# Altium PCB fmc-320u-a1.PcbDoc (part 1 of 2)
Units mm, origin at the board's own origin, x right, y up, seen from the top; angles counter-clockwise.
Board outline 96 x 84 mm, 2 copper layers (L1, L2), stack 0.533 mm thick; 72 components, 120 nets, 399 pads, 155 vias.
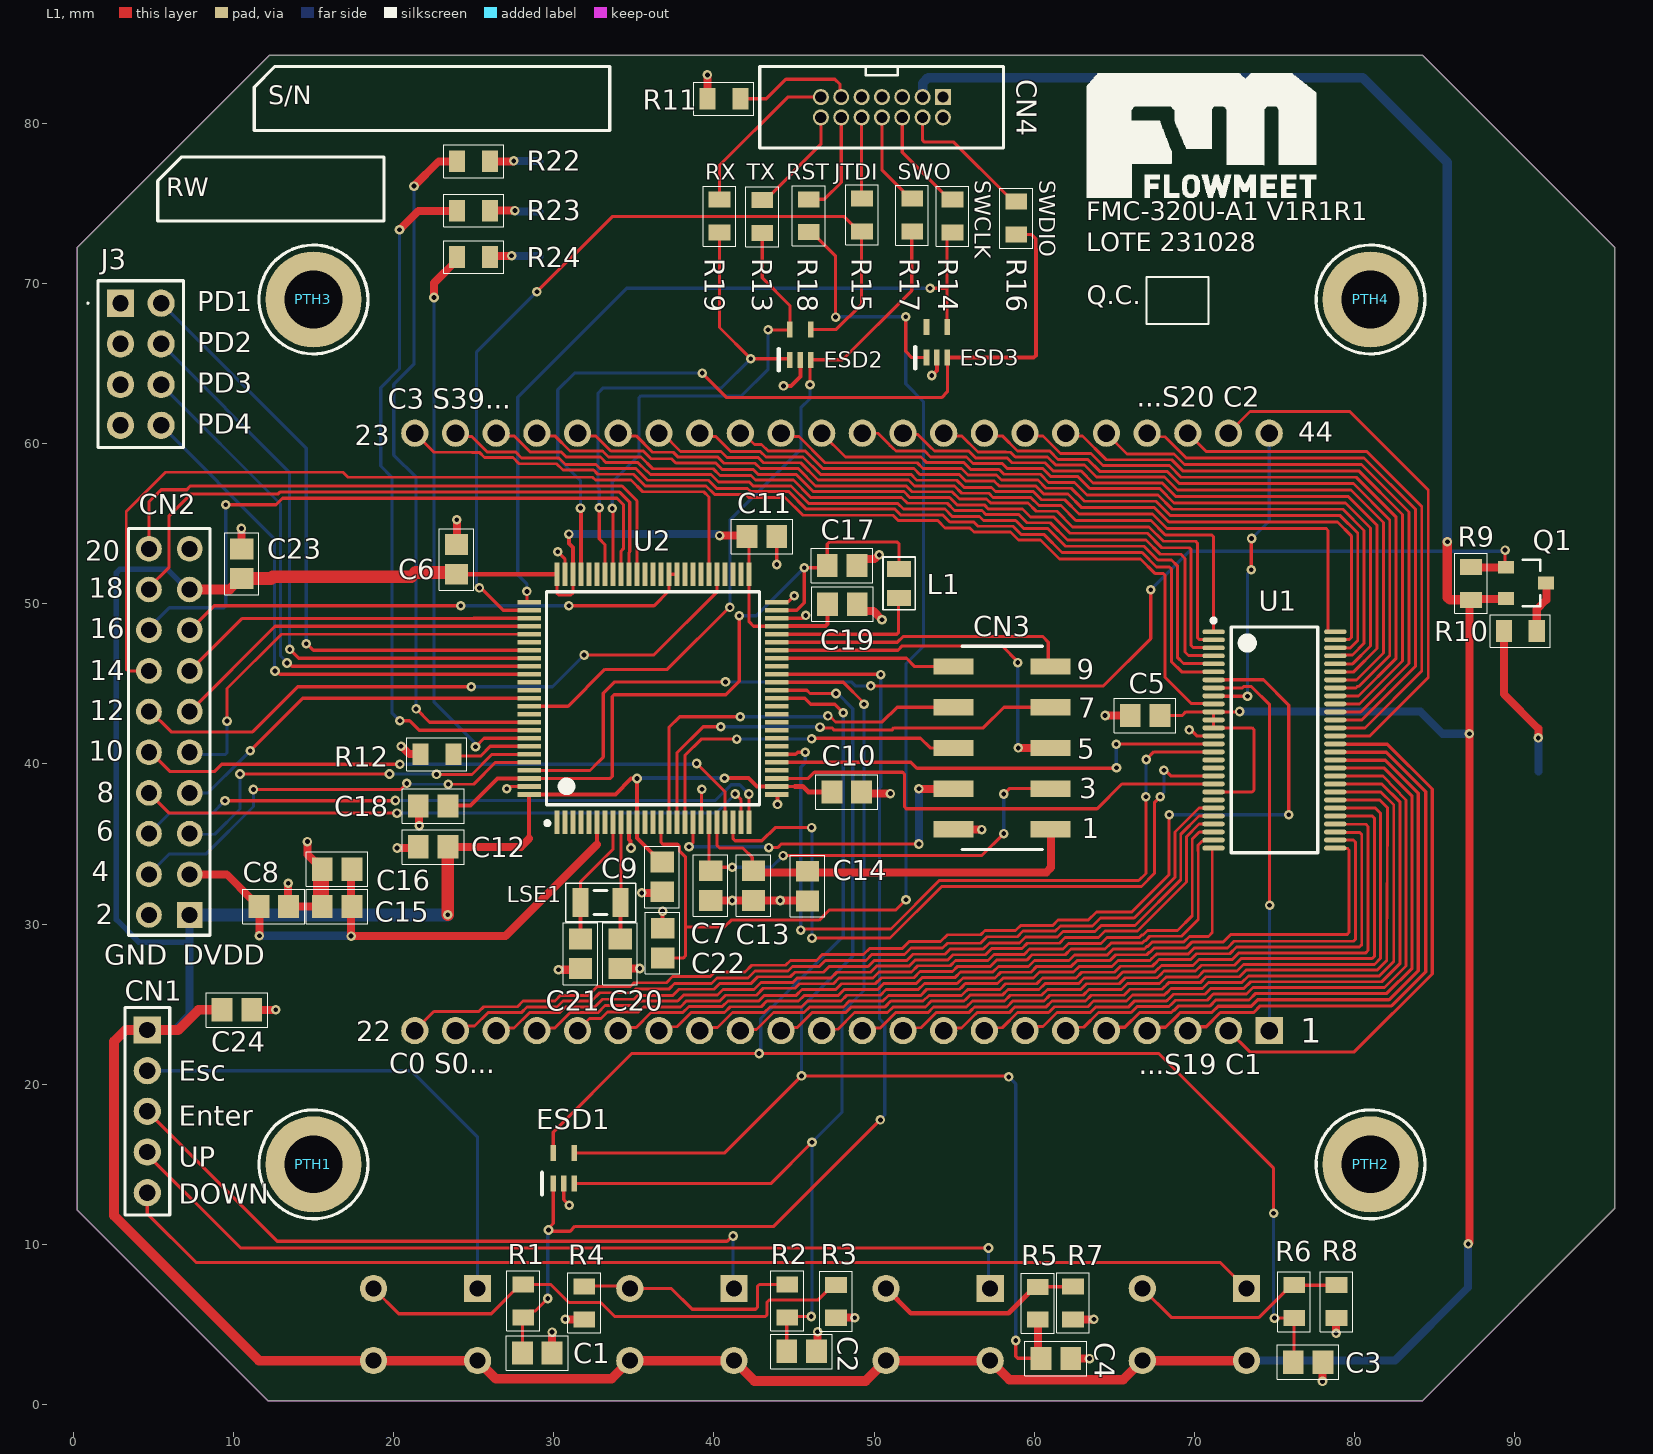
[diagram p0: L1 view]
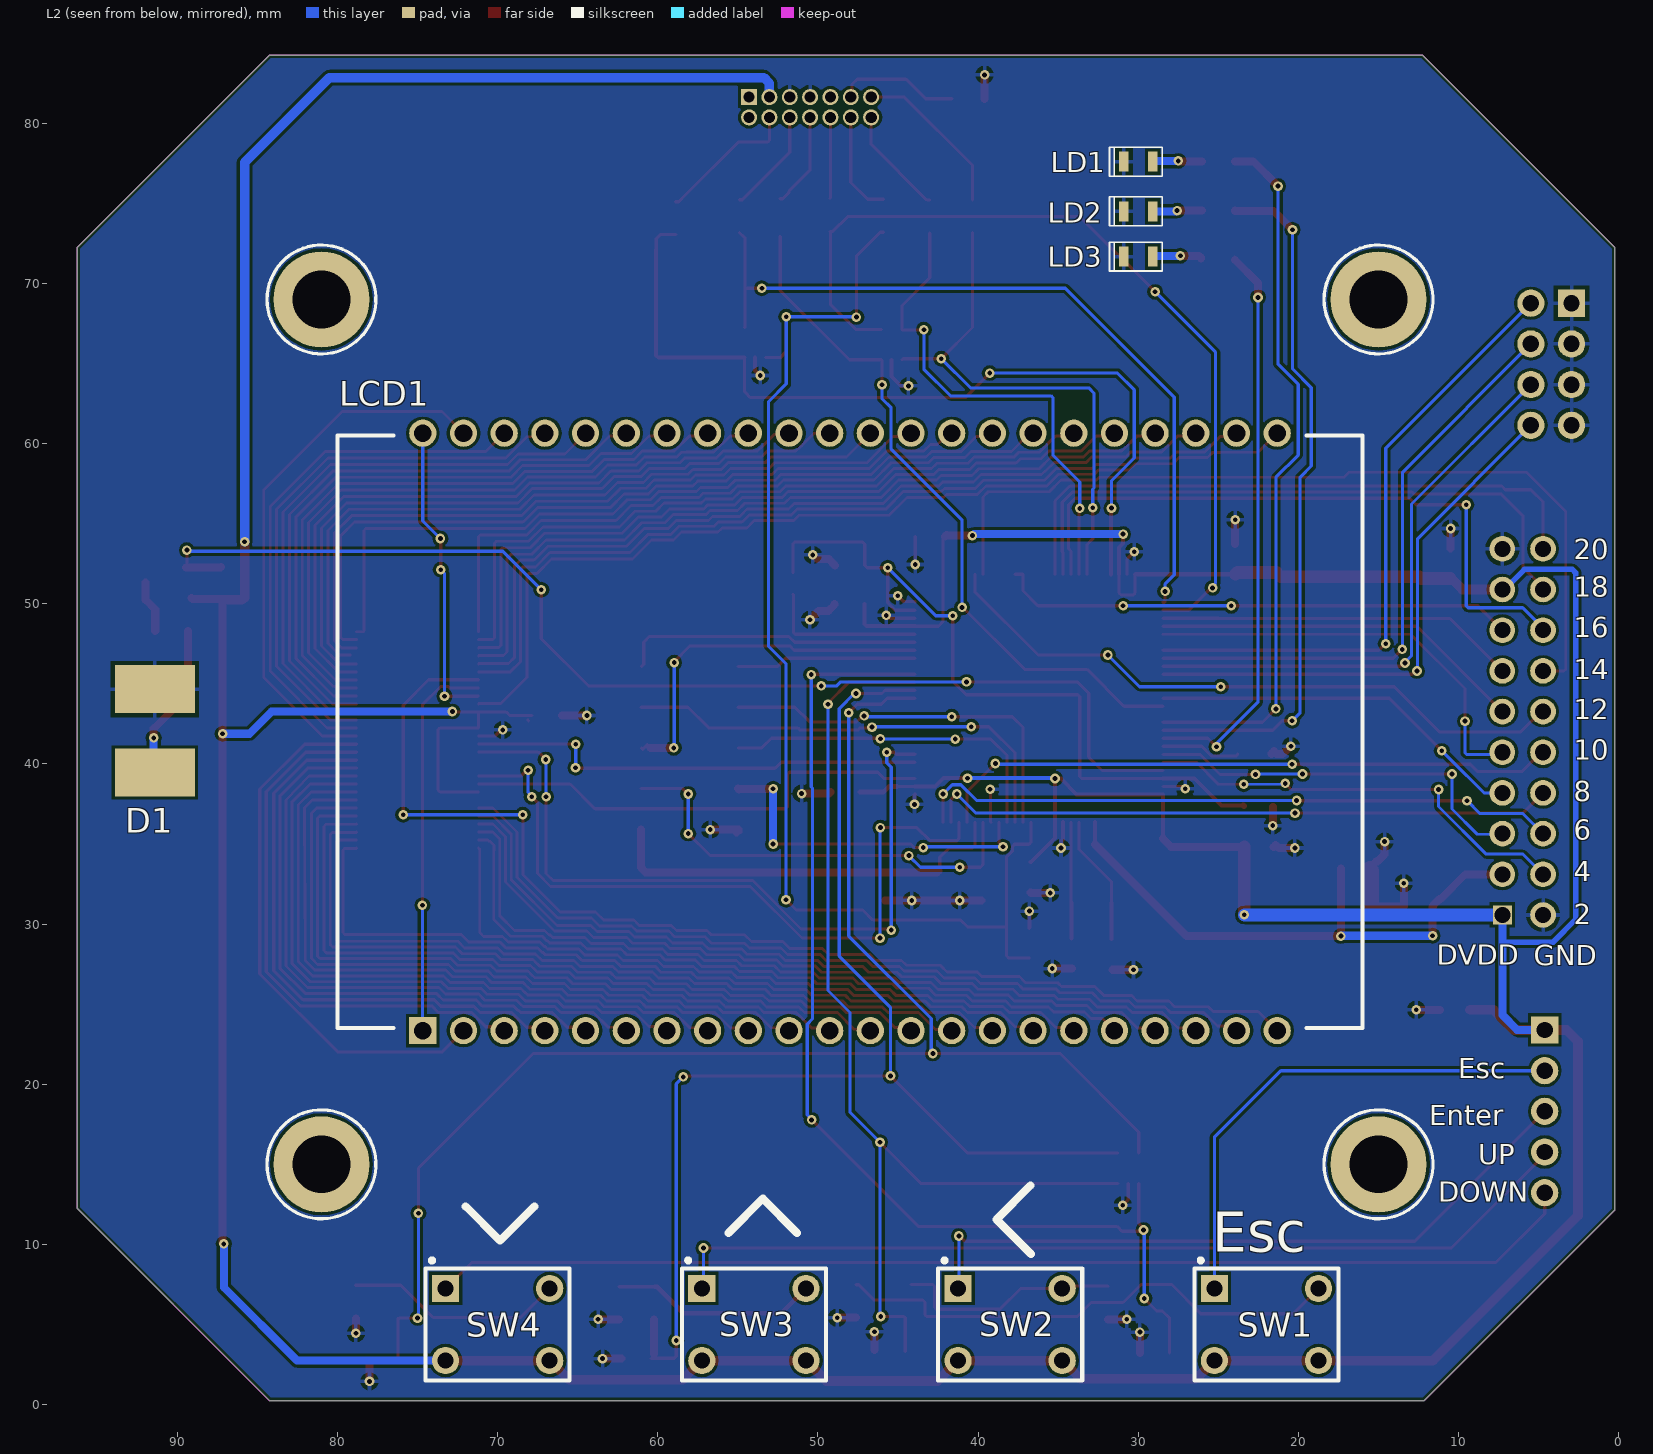
[diagram p1: L2 view, seen from below]
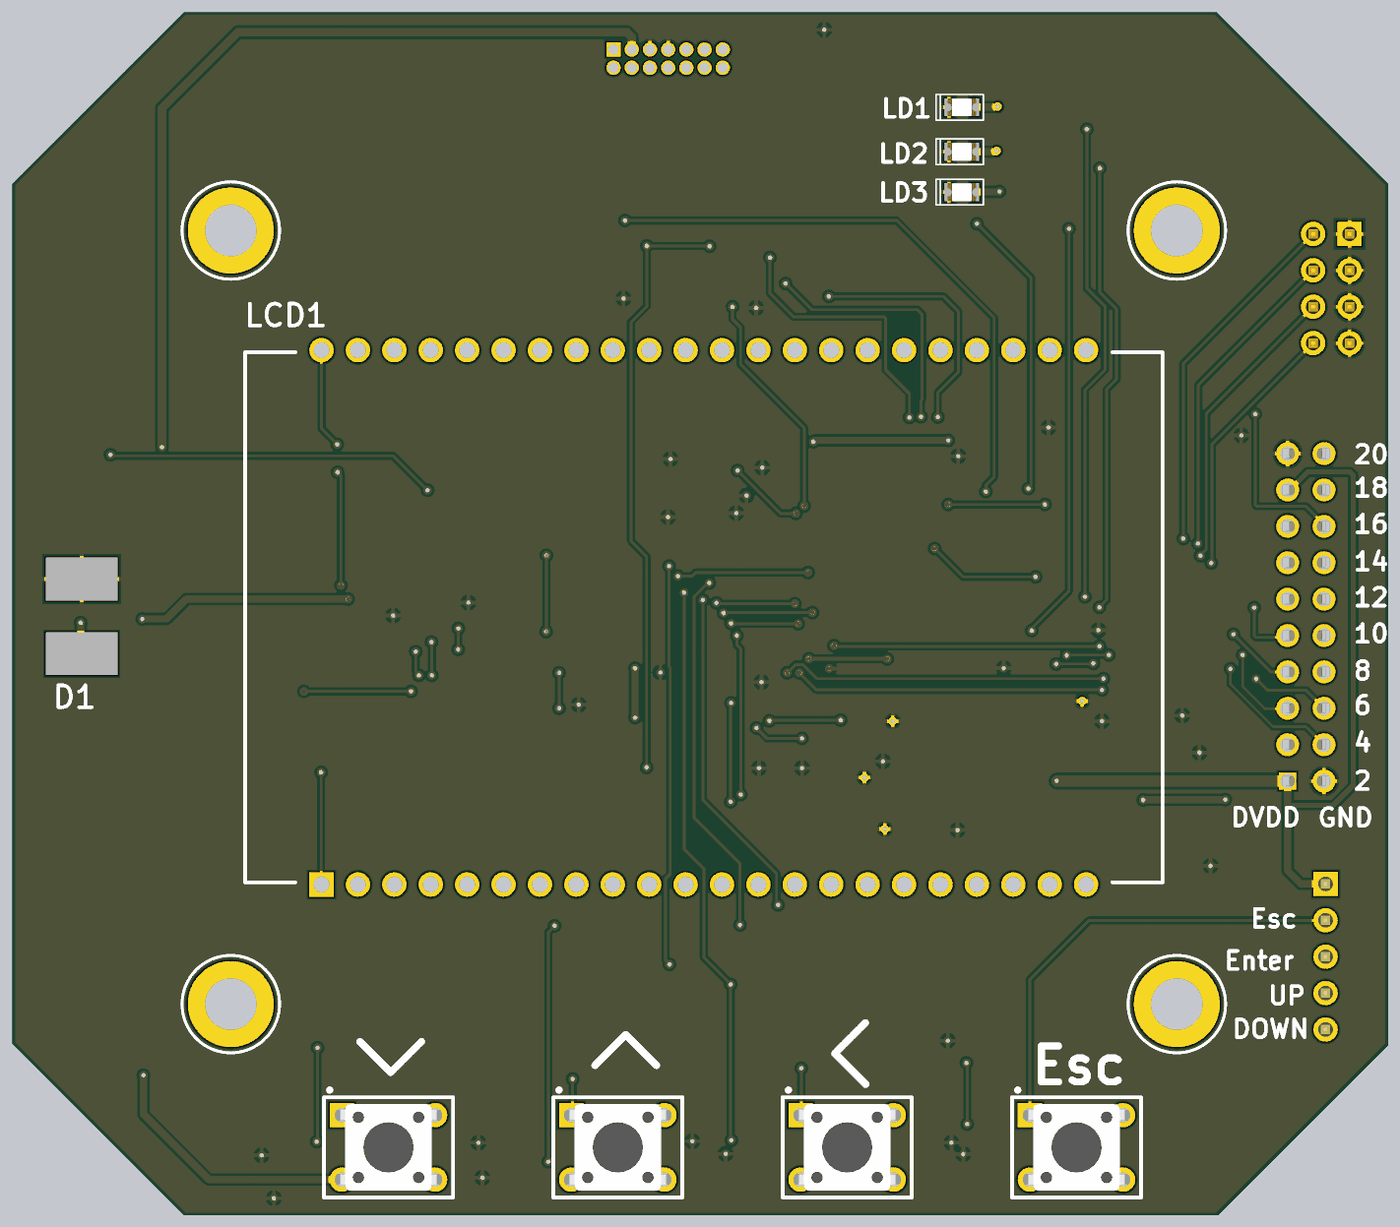
[diagram p3: 3D render of the assembled board from below, using the file's embedded part models]

## Layer stack, top to bottom
Top Solder: solder mask 0.0102, Solder Resist, Dk 3.5
L1: signal copper 0.0356
Dielectric 2: prepreg 0.0711, PP-006, Dk 4.1
Dielectric 1: dielectric 0.32, FR-4, Dk 4.8
Dielectric 3: prepreg 0.0711, PP-006, Dk 4.1
L2: signal copper 0.0356
Bottom Solder: solder mask 0.0102, Solder Resist, Dk 3.5

## Board outline
0.25,12.15 0.25,72.25 12.25,84.25 84.25,84.25 96.25,72.25 96.25,12.25 84.25,0.25 12.15,0.25

## Design rules (kind name [scope] priority, off if disabled: settings)
BoardOutlineClearance [All] p1: gap=0.2 ignorepadtopadclearanceinfootprint=FALSE
Clearance [All] p1: gap=0.18 ignorepadtopadclearanceinfootprint=FALSE
ComponentClearance [All] p1: gap=0.099 collisioncheckmode=3 verticalgap=0.099 showdistances=FALSE
HoleSize [All] p1: absolutevalues=TRUE maxlimit=6 minlimit=0.25 maxpercent=80.000 minpercent=20.000
MinimumSolderMaskSliver [All] p1: minsoldermaskwidth=0.051
PolygonConnect [All] p1: connectstyle=Relief reliefconductorwidth=0.254 reliefentries=4 polygonreliefangle="90 Angle" airgapwidth=0.254
RoutingVias [All] p1: holewidth=0.3 width=0.6 viastyle="Through Hole" minholewidth=0.3 minwidth=0.6 maxholewidth=6 maxwidth=10
SilkToSilkClearance [All] p1: silktosilkclearance=0.15
SilkToSolderMaskClearance [IsPad] p1: minsilkscreentomaskgap=0.15 clearancetoexposedcopper=TRUE
SolderMaskExpansion [All] p1: expansion=0.102 istentingtop=FALSE
Width [All] p1: maxlimit=10 minlimit=0.18 preferedwidth=0.2
25 further rules are at their usual default settings.

## Components (designator, comment, footprint, x,y, rotation, side; value= is the part's Value field where it differs from the comment)
C1 "100nF" CAP_SM0805_YAGEOCC2_N 28.975,3.215 r0 top
C2 "100nF" CAP_SM0805_YAGEOCC2_N 45.475,3.325 r0 top
C3 "100nF" CAP_SM0805_YAGEOCC2_N 77.1,2.65 r0 top
C4 "100nF" CAP_SM0805_YAGEOCC2_N 61.35,2.875 r0 top
C5 "100nF" CAP_SM0805_YAGEOCC2_N 66.923,43.025 r180 top
C6 "100nF" CAP_SM0805_YAGEOCC2_N 23.925,52.773 r90 top
C7 "100nF" CAP_SM0805_YAGEOCC2_N 39.8,32.402 r270 top
C8 "10uF" CAP_SM0805_YAGEOCC2_N 12.523,31.1 r0 top
C9 "100nF" CAP_SM0805_YAGEOCC2_N 36.775,32.95 r270 top
C10 "100nF" CAP_SM0805_YAGEOCC2_N 48.298,38.25 r0 top
C11 "100nF" CAP_SM0805_YAGEOCC2_N 43,54.2 r0 top
C12 "100nF" CAP_SM0805_YAGEOCC2_N 22.475,34.825 r180 top
C13 "100nF" CAP_SM0805_YAGEOCC2_N 42.475,32.402 r270 top
C14 "2.2uF" CAP_SM0805_YAGEOCC2_N 45.85,32.375 r270 top
C15 "100nF" CAP_SM0805_YAGEOCC2_N 16.473,31.1 r180 top
C16 "1uF" CAP_SM0805_YAGEOCC2_N 16.473,33.427 r180 top
C17 "2.2uF" CAP_SM0805_YAGEOCC2_N 48.007,52.396 r0 top
C18 "2.2uF" CAP_SM0805_YAGEOCC2_N 22.475,37.375 r180 top
C19 "10uF" CAP_SM0805_YAGEOCC2_N 48.027,49.975 r0 top
C20 "12pF" CAP_SM0805_YAGEOCC2_N 34.15,28.15 r270 top
C21 "12pF" CAP_SM0805_YAGEOCC2_N 31.675,28.15 r270 top
C22 "100nF" CAP_SM0805_YAGEOCC2_N 36.805,28.816 r90 top
C23 "10uF" CAP_SM0805_YAGEOCC2_N 10.525,52.502 r270 top
C24 "10uF" CAP_SM0805_YAGEOCC2_N 10.223,24.65 r0 top
CN1 "54101-T0605LF" "HEADER PIN 1X5" 4.625,18.31 r270 top locked
CN2 "DW254R-22-20-85" DW254R-22-10-85 6,42 r90 top
CN3 "DW254S-22-10-85" "2X5 100 MILS SMD" 58,41 r90 top locked
CN4 "20021511-00014T4LF" 2002151100014T4LF 50.49,81 r180 top (schematic designator J1)
D1 "BACKLIGHT" BACKLIGHT 50,42 r180 bottom locked
ESD1 "ESDALC6V1W5" ESDALC6V1W5 30.625,14.75 r90 top locked
ESD2 "ESDALC6V1W5" ESDALC6V1W5 45.4,66.182 r90 top
ESD3 "ESDALC6V1W5" ESDALC6V1W5 53.924,66.319 r90 top
J3 "B-2100S08P-B110-JUMPER" "HEADER PIN 2X4" 4.22,64.955 r270 top
L1 "2.2uH" LQM21PN2R2MGHL 51.562,51.268 r270 top
LCD1 "FM-160LCD-V2R2R1" "FMC-160LCD V2" 48,42 r180 bottom locked
LD1 "RED" "LED 0805" 30,77.6 r0 bottom
LD2 "GREEN" "LED 0805" 30,74.5 r0 bottom
LD3 "BLUE" "LED 0805" 30,71.675 r0 bottom
LSE1 "32.768 Hz" SC-32S32.768kHz20PPM12.5pF 32.925,31.35 r180 top
PTH1 "PTH-3MM-M" PTH_M3_M 15,15 r0 top
PTH2 "PTH-3MM-M" PTH_M3_M 81,15 r0 top
PTH3 "PTH-3MM-M" PTH_M3_M 15,69 r0 top
PTH4 "PTH-3MM-M" PTH_M3_M 81,69 r0 top
Q1 "DMG3401LSN-7" DMG3401LSN-7 90.85,51.3 r0 top
R1 "100K" RES_SM0805_YAGEORC_N 28.097,6.474 r270 top
R2 "100K" RES_SM0805_YAGEORC_N 44.575,6.477 r270 top
R3 "100K" RES_SM0805_YAGEORC_N 47.625,6.45 r90 top
R4 "100K" RES_SM0805_YAGEORC_N 31.9,6.35 r90 top
R5 "100K" RES_SM0805_YAGEORC_N 60.225,6.327 r270 top
R6 "100K" RES_SM0805_YAGEORC_N 76.225,6.427 r270 top
R7 "100K" RES_SM0805_YAGEORC_N 62.425,6.352 r90 top
R8 "100K" RES_SM0805_YAGEORC_N 78.875,6.427 r90 top
R9 "1M" RES_SM0805_YAGEORC_N 87.275,51.277 r270 top
R10 "47R" RES_SM0805_YAGEORC_N 90.35,48.3 r0 top
R11 "100R" RES_SM0805_YAGEORC_N 40.625,81.525 r0 top
R12 "10K" RES_SM0805_YAGEORC_N 22.708,40.615 r0 top
R13 "47R" RES_SM0805_YAGEORC_N 43.025,74.175 r270 top
R14 "47R" RES_SM0805_YAGEORC_N 54.9,74.2 r270 top
R15 "47R" RES_SM0805_YAGEORC_N 49.25,74.275 r270 top
R16 "47R" RES_SM0805_YAGEORC_N 58.875,74.075 r270 top
R17 "47R" RES_SM0805_YAGEORC_N 52.375,74.263 r270 top
R18 "47R" RES_SM0805_YAGEORC_N 45.925,74.225 r270 top
R19 "47R" RES_SM0805_YAGEORC_N 40.35,74.2 r270 top
R22 "1K" RES_SM0805_YAGEORC_N 25,77.625 r0 top
R23 "1K" RES_SM0805_YAGEORC_N 25,74.549 r0 top
R24 "1K" RES_SM0805_YAGEORC_N 25,71.653 r0 top
SW1 "TC-1102-B-A-B" TC-1102-B-A-B 22,5 r180 bottom locked
SW2 "TC-1102-B-A-B" TC-1102-B-A-B 38,5 r180 bottom locked
SW3 "TC-1102-B-A-B" TC-1102-B-A-B 54,5 r180 bottom locked
SW4 "TC-1102-B-A-B" TC-1102-B-A-B 70,5 r180 bottom locked
U1 "PCF8553DTT" "LCD DRIVER - TSSOP56" 75,41.5 r0 top locked
U2 "STM32U575VI_1" STM32U575VI 36.2,44.1 r90 top locked

## Footprints (in the part's own frame and the unit in brackets; to place one, negate y for a bottom-side part, rotate by r counter-clockwise, add the part's x,y. Pads: shape width x height; smd on the part's side, far side on the other; paste and mask are expansions set on the pad)
"2X5 100 MILS SMD" [mm]
  rect 1.02x2.5 smd: 1(-5.08,-3.025) 2(-5.08,3.025) 3(-2.54,-3.025) 4(-2.54,3.025) 5(0,-3.025) 6(0,3.025) 7(2.54,-3.025) 8(2.54,3.025) 9(5.08,-3.025) 10(5.08,3.025)
  silkscreen extent -6.35,-2.51 6.35,2.51, body extent -6.39,-3.02 6.23,3.02, height 7.2
2002151100014T4LF [mm]
  rect 1x1 hole 0.7: 1(-3.81,-0.635)
  round 1 hole 0.7: 2(-3.81,0.635) 3(-2.54,-0.635) 4(-2.54,0.635) 5(-1.27,-0.635) 6(-1.27,0.635) 7(0,-0.635) 8(0,0.635) 9(1.27,-0.635) 10(1.27,0.635) 11(2.54,-0.635) 12(2.54,0.635) 13(3.81,-0.635) 14(3.81,0.635)
  silkscreen extent -7.59,-2.54 7.62,2.55, body extent -7.57,-2.55 7.62,2.55, height 5.4
BACKLIGHT [mm]
  rect 5x3 smd: 1(-41.402,-2.54) 2(-41.402,2.667)
  body extent -39.37,-16.5 34.5,16.5, height 3
CAP_SM0805_YAGEOCC2_N [mm] "Capacitor, Yageo CC Class2, SM0805, IPC Medium Density"
  rect 1.3x1.45 smd: 1(-0.927,0) 2(0.927,0)
  silkscreen extent -1.92,-1.07 1.92,1.07, body extent -1.1,-0.72 1.1,0.72, height 1.45
DMG3401LSN-7 [mm]
  rect 1x0.8 smd: D(1.1,0) G(-1.4,0.975) S(-1.4,-0.975)
  silkscreen extent -0.35,-1.45 0.75,1.45, body extent -1.67,-1.55 1.33,1.55, height 1.45
DW254R-22-10-85 [mm]
  rect 1.6x1.6 / inner round 1.2 / far side rect 1.2x1.2 hole 1: 1(-11.43,-1.27)
  round 1.6 hole 1: 2(-11.43,1.27) 3(-8.89,-1.27) 4(-8.89,1.27) 5(-6.35,-1.27) 6(-6.35,1.27) 7(-3.81,-1.27) 8(-3.81,1.27) 9(-1.27,-1.27) 10(-1.27,1.27) 11(1.27,-1.27) 12(1.27,1.27) 13(3.81,-1.27) 14(3.81,1.27) 15(6.35,-1.27) 16(6.35,1.27) 17(8.89,-1.27) 18(8.89,1.27) 19(11.43,-1.27) 20(11.43,1.27)
  silkscreen extent -12.7,-2.54 12.7,2.54, body extent -12.7,-2.54 12.7,2.54, height 8.55
ESDALC6V1W5 [mm]
  rect 1x0.35 smd: 1(-0.95,0.65) 2(-0.95,0) 3(-0.95,-0.65) 4(0.95,-0.65) 5(0.95,0.65)
  silkscreen extent -1.63,1.35 -0.28,1.35, body extent -1.07,-1 1.03,1, height 1.1
"FMC-160LCD V2" [mm]
  rect 1.7x1.7 hole 1.1: 1(-26.67,-18.65)
  round 1.7 hole 1.1: 2(-24.13,-18.65) 3(-21.59,-18.65) 4(-19.05,-18.65) 5(-16.51,-18.65) 6(-13.97,-18.65) 7(-11.43,-18.65) 8(-8.89,-18.65) 9(-6.35,-18.65) 10(-3.81,-18.65) 11(-1.27,-18.65) 12(1.27,-18.65) 13(3.81,-18.65) 14(6.35,-18.65) 15(8.89,-18.65) 16(11.43,-18.65) 17(13.97,-18.65) 18(16.51,-18.65) 19(19.05,-18.65) 20(21.59,-18.65) 21(24.13,-18.65) 22(26.67,-18.65) 23(26.67,18.65) 24(24.13,18.65) 25(21.59,18.65) 26(19.05,18.65) 27(16.51,18.65) 28(13.97,18.65) 29(11.43,18.65) 30(8.89,18.65) 31(6.35,18.65) 32(3.81,18.65) 33(1.27,18.65) 34(-1.27,18.65) 35(-3.81,18.65) 36(-6.35,18.65) 37(-8.89,18.65) 38(-11.43,18.65) 39(-13.97,18.65) 40(-16.51,18.65) 41(-19.05,18.65) 42(-21.59,18.65) 43(-24.13,18.65) 44(-26.67,18.65)
  silkscreen extent -32,-18.5 32,18.5, body extent -32,-19.56 32,19.54, height 7
"HEADER PIN 1X5" [mm]
  rect 1.7x1.7 hole 1.02: 1(-5.08,0)
  round 1.7 hole 1.02: 2(-2.54,0) 3(0,0) 4(2.54,0) 5(5.08,0)
  silkscreen extent -6.48,-1.4 6.48,1.4, body extent -6.35,-1.27 6.35,1.27, height 8.47
"HEADER PIN 2X4" [mm]
  rect 1.7x1.7 hole 1.02: 1(-3.81,-1.27)
  round 1.7 hole 1.02: 2(-3.81,1.27) 3(-1.27,-1.27) 4(-1.27,1.27) 5(1.27,-1.27) 6(1.27,1.27) 7(3.81,-1.27) 8(3.81,1.27)
  silkscreen extent -5.21,-3.35 5.21,2.67, body extent -5.08,-2.54 5.08,2.54, height 8.89
"LCD DRIVER - TSSOP56" [mm] "TSSOP, 56-Leads, Body 14,00x6,10mm, Pitch 0,50mm, IPC Medium Density"
  oval 1.4x0.3 smd: 1(-3.8,6.75) 2(-3.8,6.25) 3(-3.8,5.75) 4(-3.8,5.25) 5(-3.8,4.75) 6(-3.8,4.25) 7(-3.8,3.75) 8(-3.8,3.25) 9(-3.8,2.75) 10(-3.8,2.25) 11(-3.8,1.75) 12(-3.8,1.25) 13(-3.8,0.75) 14(-3.8,0.25) 15(-3.8,-0.25) 16(-3.8,-0.75) 17(-3.8,-1.25) 18(-3.8,-1.75) 19(-3.8,-2.25) 20(-3.8,-2.75) 21(-3.8,-3.25) 22(-3.8,-3.75) 23(-3.8,-4.25) 24(-3.8,-4.75) 25(-3.8,-5.25) 26(-3.8,-5.75) 27(-3.8,-6.25) 28(-3.8,-6.75) 29(3.8,-6.75) 30(3.8,-6.25) 31(3.8,-5.75) 32(3.8,-5.25) 33(3.8,-4.75) 34(3.8,-4.25) 35(3.8,-3.75) 36(3.8,-3.25) 37(3.8,-2.75) 38(3.8,-2.25) 39(3.8,-1.75) 40(3.8,-1.25) 41(3.8,-0.75) 42(3.8,-0.25) 43(3.8,0.25) 44(3.8,0.75) 45(3.8,1.25) 46(3.8,1.75) 47(3.8,2.25) 48(3.8,2.75) 49(3.8,3.25) 50(3.8,3.75) 51(3.8,4.25) 52(3.8,4.75) 53(3.8,5.25) 54(3.8,5.75) 55(3.8,6.25) 56(3.8,6.75)
  silkscreen extent -3.92,-7.05 2.7,7.57, body extent -4.05,-7.05 4.05,7.05, height 1.2
"LED 0805" [mm]
  rect 0.6x1.25 smd: A(-0.9,0) K(0.9,0)
  silkscreen extent -1.5,-0.9 1.8,0.9, body extent -1,-0.63 1,0.63, height 1
LQM21PN2R2MGHL [mm]
  rect 1x1.5 smd: 1(-0.9,0) 2(0.9,0)
  silkscreen extent -1.65,-1 1.65,1, body extent -1,-0.62 1,0.62, height 1.02
PTH_M3_M [mm]
  round 6 hole 3.6: 1(0,0)
  silkscreen extent -3.4,-3.4 3.4,3.4
RES_SM0805_YAGEORC_N [mm] "Resistor, Yageo RC_L, SM0805, IPC Medium Density"
  rect 1x1.35 smd: 1(-1.027,0) 2(1.027,0)
  silkscreen extent -1.88,-1.02 1.88,1.02, body extent -1.05,-0.67 1.05,0.67, height 0.6
SC-32S32.768kHz20PPM12.5pF [mm]
  rect 1x1.8 smd: 1(-1.25,0) 2(1.25,0)
  silkscreen extent -2.21,-1.19 2.18,1.19, body extent -1.65,-0.84 1.65,0.76, height 0.84
STM32U575VI [mm] "Ultra-low-power with FPU Arm Cortex-M33 MCU with TrustZone, 160 MHz with 2 Mbytes of Flash memory"
  rect 1.475x0.3 smd mask+0.051: 1(-7.738,6) 2(-7.738,5.5) 3(-7.738,5) 4(-7.738,4.5) 5(-7.738,4) 6(-7.738,3.5) 7(-7.738,3) 8(-7.738,2.5) 9(-7.738,2) 10(-7.738,1.5) 11(-7.738,1) 12(-7.738,0.5) 13(-7.738,0) 14(-7.738,-0.5) 15(-7.738,-1) 16(-7.738,-1.5) 17(-7.738,-2) 18(-7.738,-2.5) 19(-7.738,-3) 20(-7.738,-3.5) 21(-7.738,-4) 22(-7.738,-4.5) 23(-7.738,-5) 24(-7.738,-5.5) 25(-7.738,-6) 51(7.738,-6) 52(7.738,-5.5) 53(7.738,-5) 54(7.738,-4.5) 55(7.738,-4) 56(7.738,-3.5) 57(7.738,-3) 58(7.738,-2.5) 59(7.738,-2) 60(7.738,-1.5) 61(7.738,-1) 62(7.738,-0.5) 63(7.738,0) 64(7.738,0.5) 65(7.738,1) 66(7.738,1.5) 67(7.738,2) 68(7.738,2.5) 69(7.738,3) 70(7.738,3.5) 71(7.738,4) 72(7.738,4.5) 73(7.738,5) 74(7.738,5.5) 75(7.738,6)
  rect 0.3x1.475 smd mask+0.051: 26(-6,-7.738) 27(-5.5,-7.738) 28(-5,-7.738) 29(-4.5,-7.738) 30(-4,-7.738) 31(-3.5,-7.738) 32(-3,-7.738) 33(-2.5,-7.738) 34(-2,-7.738) 35(-1.5,-7.738) 36(-1,-7.738) 37(-0.5,-7.738) 38(0,-7.738) 39(0.5,-7.738) 40(1,-7.738) 41(1.5,-7.738) 42(2,-7.738) 43(2.5,-7.738) 44(3,-7.738) 45(3.5,-7.738) 46(4,-7.738) 47(4.5,-7.738) 48(5,-7.738) 49(5.5,-7.738) 50(6,-7.738) 76(6,7.738) 77(5.5,7.738) 78(5,7.738) 79(4.5,7.738) 80(4,7.738) 81(3.5,7.738) 82(3,7.738) 83(2.5,7.738) 84(2,7.738) 85(1.5,7.738) 86(1,7.738) 87(0.5,7.738) 88(0,7.738) 89(-0.5,7.738) 90(-1,7.738) 91(-1.5,7.738) 92(-2,7.738) 93(-2.5,7.738) 94(-3,7.738) 95(-3.5,7.738) 96(-4,7.738) 97(-4.5,7.738) 98(-5,7.738) 99(-5.5,7.738) 100(-6,7.738)
  silkscreen extent -7.9,-6.65 6.65,6.7, body extent -8.1,-8.1 8.1,8.1, height 1.6
TC-1102-B-A-B [mm] "Tactile 6x6mm true hole"
  rect 1.7x1.7 hole 1: 1(-3.25,2.25)
  round 1.7 hole 1: 2(3.25,2.25) 3(-3.25,-2.25) 4(3.25,-2.25)
  silkscreen extent -4.5,-3.5 4.5,4.12, body extent -3.87,-3.02 3.87,3.01, height 5.02

## Part data
C1 C2 C3 C4 C5: library part CC0805KRX7R8BB104, "CAP 100nF SM0805 X7R 25V YAGEO CC2", Manufacturer=Yageo, Package=0805, Supplier Part Number 1=644249, Tolerance (%)=10, Voltage Rating (Volts)=25, Category=Capacitor, ComponentLink1Description="Manufacturer Website", ComponentLink1URL=http://www.yageo.com, Manufacturer Part Number=CC0805KRX7R8BB104, Supplier 1=Farnell, Supplier 2=Digi-Key, Supplier Part Number 2=311-1141-1-ND
C6 C7 C9 C10 C11 C12 C13 C15 C22: library part CC0805KRX7R9BB104, "CAP 100nF SM0805 X7R 50V YAGEO CC2", Manufacturer=Yageo, Package=0805, Supplier Part Number 1=3019949, Tolerance (%)=10, Voltage Rating (Volts)=50, Category=Capacitor, ComponentLink1Description="Manufacturer Website", ComponentLink1URL=http://www.yageo.com, Manufacturer Part Number=CC0805KRX7R9BB104, Supplier 1=Farnell, Supplier 2=Digi-Key, Supplier Part Number 2=311-1140-1-ND
C8 C19 C23 C24: library part CC0805KKX5R8BB106, "CAP 10uF SM0805 X5R 25V YAGEO", Manufacturer=Yageo, Package=0805, Tolerance=10, Category=Capacitor, ComponentLink1Description="Manufacturer Website", ComponentLink1URL=http://www.yageo.com, Manufacturer Part Number=CC0805KKX5R8BB106
C14 C17 C18: library part CC0805KKX7R8BB225, "CAP 2u2F SM0805 X7R 25V YAGEO CC2", Manufacturer=Yageo, Package=0805, Supplier Part Number 1=1458904, Tolerance (%)=10, Voltage Rating (Volts)=25, Category=Capacitor, ComponentLink1Description="Manufacturer Website", ComponentLink1URL=http://www.yageo.com, Manufacturer Part Number=CC0805KKX7R8BB225, Supplier 1=Farnell, Supplier 2=Digi-Key
C16: library part CC0805KKX7R8BB105, "CAP 1uF SM0805 X7R 25V YAGEO CC2", Manufacturer=Yageo, Package=0805, Supplier Part Number 1=1458903, Tolerance (%)=10, Voltage Rating (Volts)=25, Category=Capacitor, ComponentLink1Description="Manufacturer Website", ComponentLink1URL=http://www.yageo.com, Manufacturer Part Number=CC0805KKX7R8BB105, Supplier 1=Farnell, Supplier 2=Digi-Key, Supplier Part Number 2=311-1456-1-ND
C20 C21: library part CC0805JRNPO9BN120, "CAP 12pF SM0805 NPO 50V YAGEO CC2", Manufacturer=Yageo, Package=0805, Tolerance (%)=5, Voltage Rating (Volts)=50, Category=Capacitor, ComponentLink1Description="Manufacturer Website", ComponentLink1URL=http://www.yageo.com, Manufacturer Part Number=CC0805JRNPO9BN120
CN1: "1 x 5 - true hole  2.54mm - Pb free", Manufacturer="Amphenol ICC", Category="Header pin", Datasheet=https://datasheet.lcsc.com/lcsc/2202082130_Amphenol-ICC-54101-T06-00_C213463.pdf, Manufacturer Part Number=54101-T0605LF
CN2: "2 x 10 - true hole 2.54mm - altura 8.5mm", Manufacturer=Dealon, Category="Header female", Part Nunber=DW254R-22-20-85
CN3: "2 x 5 - SMD 2.54mm - altura 8.5mm", Manufacturer=Dealon, Category="Header female", Datasheet=https://datasheet.lcsc.com/lcsc/2209141730_DEALON-DW254S-22-10-85_C5160820.pdf, Manufacturer Part Number=DW254S-22-10-85
CN4: "1.27mm (0.05in.) pitch, Shrouded header, 14 contacts", Manufacturer="Amphenol ICC", Category="Header Shrouded", Datasheet=https://cdn.amphenol-cs.com/media/wysiwyg/files/drawing/20021511.pdf, Manufacturer Part Number=20021511-00014T4LF
D1: library part FM-160-BACKLIGHT, "IF=45mA;VF=3V", Manufacturer="Provided by us", Category=Backlight, ComponentLink1Description=Datasheet, Manufacturer Part Number="Provided by us"
ESD1 ESD2 ESD3: "TVS Diode Array Uni-Directional 6.1V  / QTY 5 per pack, SOT-323 /  / Ranking 5:  / Marca reconocida. / Usado en placas nucleo, sometidas a manipuleo nunca note un pin quemado por ESD.", Manufacturer=ST, Category=Diodo, ComponentLink1Description=Datasheet, Datasheet=https://www.st.com/content/ccc/resource/technical/document/datasheet/32/30/02/e6/ac/0f/46/c2/CD00002946.pdf/files/CD00002946.pdf/jcr:content/translations/en.CD00002946.pdf, Manufacturer Part Number=ESDALC6V1W5
J3: "2 x 4 - true hole  2.54mm", Manufacturer=Ckmtw, Manufacturer Part Number=B-2100S08P-B110, Category="Header pin", Datasheet=https://datasheet.lcsc.com/lcsc/2304140030_Ckmtw-Shenzhen-Cankemeng-B-2100S08P-B110_C124386.pdf
L1: library part LQM21PN2R2MGHL, "Inductores de potencia - SMD 2.2 UH 20%", Manufacturer="Murata Electronics", Category=Inductor, Datasheet=https://ar.mouser.com/datasheet/2/281/1/JELF243B_0040-961444.pdf, Manufacturer Part Number=LQM21PN2R2MGHL
LD1: library part 17-21SYGC/S530-E2/TR8, Manufacturer="Everlight Elec", Category=LED, ComponentLink1Description=Datasheet, ComponentLink1URL=https://datasheet.lcsc.com/lcsc/1808272351_Everlight-Elec-17-21SURC-S530-A2-TR8_C131244.pdf, Manufacturer Part Number=17-21SYGC/S530-E2/TR8
LD2: library part 17-21SURC/S530-A2/TR8, Manufacturer="Everlight Elec", Manufacturer Part Number=17-21SYGC/S530-E2/TR8, Category=LED, ComponentLink1Description=Datasheet, Datasheet=https://datasheet.lcsc.com/lcsc/1811011222_Everlight-Elec-17-21SYGC-S530-E2-TR8_C73548.pdf
LD3: library part 17-21/BHC-XL2M2TY/3T, Manufacturer="Everlight Elec", Category=LED, Datasheet=https://datasheet.lcsc.com/lcsc/1809192317_Everlight-Elec-17-21-BHC-XL2M2TY-3T_C72035.pdf, Manufacturer Part Number=17-21/BHC-XL2M2TY/3T
LSE1: library part SC-32S32.768kHz20PPM12.5pF
PTH1 PTH2 PTH3 PTH4: "Agujero de montaje metalizado roscas M3. Drill de tamaño medio."
Q1: "P-CHANNEL ENHANCEMENT MODE MOSFET / RDS(ON) = 85mΩ @ VGS = -2.5V -> ID -2.7A / V(BR)DDS 30V", Manufacturer="Diodes Incorporated", Category="Transistor mosfet", ComponentLink1Description=datasheet, ComponentLink1URL=https://www.digikey.com/es/products/detail/diodes-incorporated/DMG3401LSN-7/3720138?s=N4IgTCBcDaICIFkDiBmALABgIwBkDKAcgLQDsIAugL5A, Manufacurer Part Number=DMG3401LSN-7
R1 R2 R3 R4 R5 R6 R7 R8: library part RC0805FR-07100KL, "RES 100K SM0805 YAGEO RC_L", Manufacturer=Yageo, Package=0805, Power (Watts)=0.125, Resistance (Ohms)=100000, Supplier Part Number 1=9237879, Tolerance (%)=1, Category=Resistor, ComponentLink1Description="Manufacturer Website", ComponentLink1URL=http://www.yageo.com, Manufacturer Part Number=RC0805FR-07100KL, Supplier 1=Farnell, Supplier 2=Digi-Key, Supplier Part Number 2=311-100KCRCT-ND
R9: library part RC0805FR-071ML, "RES 1M SM0805 YAGEO RC_L", Manufacturer=Yageo, Package=0805, Power (Watts)=0.125, Resistance (Ohms)=1000000, Supplier Part Number 1=9237992, Tolerance (%)=1, Category=Resistor, ComponentLink1Description="Manufacturer Website", ComponentLink1URL=http://www.yageo.com, Manufacturer Part Number=RC0805FR-071ML, Supplier 1=Farnell, Supplier 2=Digi-Key, Supplier Part Number 2=311-1.00MCRCT-ND
R10 R13 R14 R15 R16 R17 R18 R19: library part RC0805FR-0747RL, "RES 47R SM0805 YAGEO RC_L", Manufacturer=Yageo, Package=0805, Power (Watts)=0.125, Resistance (Ohms)=47, Supplier Part Number 1=9237321, Tolerance (%)=1, Category=Resistor, ComponentLink1Description="Manufacturer Website", ComponentLink1URL=http://www.yageo.com, Manufacturer Part Number=RC0805FR-0747RL, Supplier 1=Farnell, Supplier 2=Digi-Key, Supplier Part Number 2=311-47.0CRCT-ND
R11: library part RC0805FR-07100RL, "RES 100R SM0805 YAGEO RC_L", Manufacturer=Yageo, Package=0805, Power (Watts)=0.125, Resistance (Ohms)=100, Supplier Part Number 1=9237364, Tolerance (%)=1, Category=Resistor, ComponentLink1Description="Manufacturer Website", ComponentLink1URL=http://www.yageo.com, Manufacturer Part Number=RC0805FR-07100RL, Supplier 1=Farnell, Supplier 2=Digi-Key, Supplier Part Number 2=311-100CRCT-ND
R12: library part RC0805FR-0710KL, "RES 10K SM0805 YAGEO RC_L", Manufacturer=Yageo, Package=0805, Power (Watts)=0.125, Resistance (Ohms)=10000, Supplier Part Number 1=9237755, Tolerance (%)=1, Category=Resistor, ComponentLink1Description="Manufacturer Website", ComponentLink1URL=http://www.yageo.com, Manufacturer Part Number=RC0805FR-0710KL, Supplier 1=Farnell, Supplier 2=Digi-Key, Supplier Part Number 2=311-10.0KCRCT-ND
R22 R23 R24: library part RC0805FR-071KL, "RES 1K SM0805 YAGEO RC_L", Manufacturer=Yageo, Package=0805, Power (Watts)=0.125, Resistance (Ohms)=1000, Supplier Part Number 1=9237496, Tolerance (%)=1, Category=Resistor, ComponentLink1Description="Manufacturer Website", ComponentLink1URL=http://www.yageo.com, Manufacturer Part Number=RC0805FR-071KL, Supplier 1=Farnell, Supplier 2=Digi-Key, Supplier Part Number 2=311-1.00KCRCT-ND
SW1 SW2 SW3 SW4: "Switch tactile 6x6mm true hole.", Manufacturer="XKB Connectivity", Category="Mechanical Switch", Datasheet=https://datasheet.lcsc.com/lcsc/2110111230_XKB-Connectivity-TC-1102-B-A-B_C480281.pdf, Manufacturer Part Number=TC-1102-B-A-B
U1: "40 × 4 LCD SEGMENT DRIVER", Category="LCD Driver", ComponentLink1Description=datasheet, ComponentLink1URL=https://datasheet.lcsc.com/lcsc/2107141507_NXP-Semicon-PCF8553DTT-AJ_C2653705.pdf
U2: Manufacturer=ST, Manufacturer Part Number=STM32U575VIT6Q, Category=Microcontrolador, Datasheet=https://www.st.com/resource/en/datasheet/stm32u575ag.pdf
LCD1: Category=LCD, ComponentLink1Description=Datasheet

## Via types
v1: diameter 0.6, hole 0.3, L1 to L2, 155 vias

## Nets (pads, with @x,y where several pads share a name; then routed paths per layer and width w, separated by ;. In a path a pad name is that pad's centre, name@x,y a point inside that pad or via, vN(x,y) a via of type N, cw(c..) or ccw(c..) an arc to the next point about the centre after c; other vN are vias at no path point)
ADC_IN3: CN3.6 U2.17 | length 21.7
  L1 w0.2: U2.17@38.2,36.362 38.2,40.55 39.2,41.55 v1@41.325,41.55 ; v1@41.325,41.625 41.4,41.55 v1(41.425,41.55) ; v1(46.1,41.575) 46.125,41.6 52.9,41.6 53.5,41 CN3.6@54.975,41
  L2 w0.2: v1(41.425,41.55) 46.075,41.55 v1(46.1,41.575)
ADC_IN4: CN3.4 U2.18 | length 21.8
  L1 w0.2: v1(38.45,34.825) 38.7,35.075 U2.18@38.7,36.362 ; v1(43.425,34.775) 43.976,34.775 44.201,35 v1(52.8,35)
  L1 w0.5: v1(52.8,38.45) 54.89,38.45 54.94,38.4 CN3.4@55,38.46
  L2 w0.2: v1(38.45,34.825) 43.375,34.825 v1(43.425,34.775)
  L2 w0.5: v1(52.8,35) v1(52.8,38.45)
AVDD: C13.1 C14.1 CN3.1 U2.21 | length 26
  L1 w0.2: U2.21@40.2,36.362 40.2,34.9 40.35,34.75 41.812,34.75 42.4,34.162 42.4,33.404 C13.1@42.475,33.329
  L1 w0.5: C13.1@42.475,33.329 42.57,33.234 45.825,33.234 46.95,33.234 60.757,33.234 61.05,33.527 CN3.1@61.05,35.92
BATTERY_LEVEL: CN3.7 U2.16 | length 29
  L1 w0.2: U2.16@37.7,36.362 37.7,40.7 39.325,42.325 v1(40.425,42.325) ; v1(46.625,42.3) 46.675,42.25 47.376,42.25 47.513,42.113 51.104,42.113 51.241,42.25 56.825,42.25 58.115,43.54 CN3.7@61.05,43.54
  L2 w0.2: v1(40.425,42.325) 46.6,42.325 v1(46.625,42.3)
COM0: LCD1.22 U1.7 | length 74.5
  L1 w0.18: LCD1.22@21.33,23.35 22.516,24.536 25.324,24.536 25.629,24.841 27.737,24.841 28.092,25.197 30.074,25.197 30.429,25.552 32.155,25.552 32.714,26.111 34.795,26.111 35.024,26.34 37.033,26.34 37.414,26.721 39.776,26.721 40.056,27 41.935,27 42.367,27.432 44.475,27.432 44.78,27.737 46.406,27.737 46.761,28.092 49.352,28.092 49.733,28.473 51.765,28.473 52.197,28.905 54.153,28.905 54.585,29.337 56.667,29.337 56.921,29.591 58.826,29.591 59.157,29.921 61.163,29.921 61.493,30.251 63.373,30.251 63.881,30.759 66.091,30.759 68.428,33.096 v1(68.428,36.83)
  L1 w0.2: U1.7@71.2,45.25 74.316,45.25 75.895,43.67 v1(75.895,36.83)
  L2 w0.2: v1(68.428,36.83) v1(75.895,36.83)
COM1: LCD1.1 U1.8 | length 24.4
  L1 w0.2: U1.8@71.2,44.75 72.99,44.75 73.071,44.831 73.568,44.831 74.7,43.699 v1(74.7,31.175)
  L2 w0.18: LCD1.1@74.67,23.35 74.7,23.38 v1(74.7,31.175)
COM2: LCD1.44 U1.9 | length 19.2
  L1 w0.2: U1.9@71.2,44.25 71.219,44.231 v1(73.319,44.231) ; v1(73.55,52.125) 73.55,54.05 v1(73.575,54.075) ; LCD1.44@74.67,60.65 74.67,60.63 LCD1.44@74.7,60.6
  L2 w0.2: v1(73.319,44.231) 73.319,51.894 v1(73.55,52.125) ; v1(73.575,54.075) 74.67,55.17 LCD1.44@74.67,60.65
COM3: LCD1.23 U1.10 | length 60.6
  L1 w0.18: LCD1.23@21.33,60.65 22.519,59.461 24.892,59.461 24.898,59.455 25.354,59.455 25.683,59.127 27.461,59.127 27.842,58.746 30.178,58.746 30.58,58.344 32.497,58.344 32.751,58.09 34.975,58.09 35.712,57.352 39.518,57.352 40.05,56.82 41.981,56.82 42.158,56.642 44.45,56.642 45.568,55.524 51.181,55.524 51.511,55.194 53.975,55.194 54.432,54.737 55.982,54.737 56.236,54.483 58.522,54.483 59.03,53.975 60.397,53.975 61.572,52.8 66.632,52.8 67.532,51.9 68.045,51.9 68.163,51.783 68.163,45.413 69.806,43.769 71.181,43.769 U1.10@71.2,43.75
DVDD: C5.1 C6.1 C9.1 C10.1 C11.1 C12.1 C19.1 C23.2 C24.1 CN1.1 CN2.1 CN2.17 CN4.3 Q1.S R9.2 SW1.3 SW1.4 SW2.3 SW2.4 SW3.3 SW3.4 SW4.3 SW4.4 U1.11 U1.12 U1.13 U1.21 U2.11 U2.27 U2.47 U2.51 U2.73 U2.75 U2.100 | length 398.4
  L1 w0.2: U2.75@30.192,51.846 U2.75@30.2,51.838 30.2,50.667 30.317,50.55 31.083,50.55 31.2,50.667 U2.73@31.2,51.838 ; C9.1@36.7,33.877 C9.1@36.775,33.877 ; C11.1@42.073,54.2 42.2,54.073 U2.51@42.2,51.838 42.2,48.875 42.475,48.6 U2.47@43.938,48.6 ; U2.27@43.938,38.6 45.05,38.6 ; C5.1@67.85,43.025 69.25,43.025 69.475,43.25 U1.11@71.2,43.25 ; C5.1@68.075,42.7 C5.1@68.125,42.75 ; U1.21@71.2,38.25 73.608,38.25 73.725,38.367 73.725,42.133 73.608,42.25 U1.13@71.2,42.25 U1.12@71.2,42.75 U1.11@71.2,43.25 ; v1(72.825,43.275) 72.8,43.25 U1.11@71.2,43.25
  L1 w0.25: U2.100@28.462,38.1 U2.100@28.473,38.1 ; 28.473,35.348 U2.100@28.473,38.1 ; v1(30.95,54.35) 30.95,53.775 31.2,53.525 U2.73@31.2,51.838 ; v1@35.204,38.972 35.2,38.968 U2.11@35.2,36.362 35.2,35.377 C9.1@36.7,33.877 ; v1(35.204,39.091) 35.19,39.076 34.835,39.076 33.858,38.1 U2.100@28.473,38.1 ; v1(40.665,39.11) 42.17,39.11 42.68,38.6 U2.27@43.938,38.6 ; U2.47@43.938,48.6 46.958,48.6 47.105,48.746 C19.1@47.105,49.971
  L1 w0.3: C6.1@23.925,51.846 U2.75@30.192,51.846 ; 45.05,38.6 45.55,38.6 45.9,38.25 C10.1@47.371,38.25
  L1 w0.5: C12.1@23.385,34.808 C12.1@23.402,34.825 27.95,34.825 28.473,35.348 ; v1(40.361,54.254) 41.927,54.254 41.973,54.3 C11.1@42.073,54.2 ; v1(87.097,10.033) 87.097,10.06 87.173,10.136 v1(87.173,41.885) 87.173,50.148 R9.2@87.275,50.25 ; R9.2@87.325,50.3 89.05,50.3 Q1.S@89.1,50.35
  L1 w0.6: CN2.17@7.27,50.89 9.765,50.89 C23.2@10.45,51.575 ; C24.1@9.296,24.65 7.825,24.65 6.565,23.39 CN1.1@4.625,23.39 3.265,23.39 2.55,22.675 2.55,11.8 11.6,2.75 SW1.4@18.75,2.75 SW1.3@25.25,2.75 26.375,1.625 33.625,1.625 SW2.4@34.75,2.75 SW2.3@41.25,2.75 42.525,1.475 49.475,1.475 SW3.4@50.75,2.75 SW3.3@57.25,2.75 58.45,1.55 65.55,1.55 SW4.4@66.75,2.75 SW4.3@73.25,2.75 ; C23.2@10.525,51.575 C23.2@10.6,51.575 ; 21.11,51.685 21.381,51.956 ; v1(85.8,53.875) 85.8,50.389 85.946,50.243 R9.2@87.232,50.243
  L1 w0.8: C23.2@10.525,51.575 12.35,51.575 12.461,51.685 21.11,51.685 ; 21.381,51.956 23.815,51.956 C6.1@23.925,51.846 ; v1(23.385,30.59) C12.1@23.385,34.808
  L2 w0.25: v1(35.204,39.091) 35.224,39.11 v1(40.665,39.11)
  L2 w0.35: 7.146,28.879 4.093,28.879 2.696,30.276 2.696,51.94 2.901,52.145 5.89,52.145 7.145,50.89 CN2.17@7.27,50.89
  L2 w0.5: CN1.1@4.625,23.39 4.626,23.389 6.341,23.389 7.27,24.317 CN2.1@7.27,30.57 ; v1@23.365,30.57 v1(23.385,30.59) ; v1(30.95,54.35) 40.265,54.35 v1(40.361,54.254) ; v1(72.825,43.275) 84.106,43.275 85.496,41.885 v1(87.173,41.885) ; SW4.3@73.25,2.75 82.525,2.75 87.097,7.322 v1(87.097,10.033)
  L2 w0.6: CN4.3@53.03,81.635 53.03,82.499 53.381,82.85 80.497,82.85 85.8,77.547 v1(85.8,53.875)
  L2 w0.8: CN2.1@7.27,30.57 v1@23.365,30.57
FLOW_DETECTOR: CN3.10 U2.43 | length 11.3
  L1 w0.2: U2.43@43.938,46.6 52.025,46.6 52.545,46.08 CN3.10@55,46.08
GND: C1.2 C2.2 C3.2 C4.2 C5.2 C6.2 C7.2 C8.2 C9.2 C10.2 C11.2 C12.2 C13.2 C14.2 C15.2 C16.2 C17.2 C18.2 C19.2 C20.2 C21.2 C22.2 C23.1 C24.2 CN2.2 CN2.19 CN3.2 CN4.5 CN4.7 D1.2 ESD1.2 ESD2.2 ESD3.2 J3.1 J3.3 J3.5 J3.7 LD1.K LD2.K LD3.K R3.1 R4.1 R7.1 R8.1 R11.1 R12.1 U1.14 U2.10 U2.19 U2.26 U2.48 U2.50 U2.74 U2.99 | length 67
  L1 w0.2: C23.1@10.5,53.454 C23.1@10.525,53.429 C23.1@10.6,53.429 ; C18.2@21.548,37.375 C18.2@21.6,37.323 ; C6.2@23.925,53.7 C6.2@23.95,53.725 ; v1(27.075,38.45) 27.183,38.45 27.333,38.6 U2.99@28.462,38.6 ; C1.2@29.9,3.217 C1.2@29.902,3.215 ; v1(30.25,53.25) 30.7,52.8 U2.74@30.7,51.838 ; ESD1.2@30.625,13.8 30.625,12.8 v1(30.975,12.45) ; C21.2@31.602,27.15 C21.2@31.675,27.223 ; R4.1@31.898,5.325 R4.1@31.9,5.323 ; C20.2@34.15,27.223 C20.2@34.152,27.225 ; C9.2@36.727,31.975 C9.2@36.775,32.023 ; C22.2@36.8,29.798 36.775,29.773 C22.2@36.805,29.743 ; v1@36.8,30.8 v1(36.8,30.813) ; U2.19@39.2,36.362 39.225,36.387 39.225,38.4 v1(39.25,38.425) ; v1(43.925,52.45) 43.925,54.198 C11.2@43.927,54.2 ; U2.48@43.938,49.1 45.558,49.1 v1(45.733,49.275) ; U2.50@43.938,50.1 43.988,50.15 44.675,50.15 v1(45.025,50.5) ; C2.2@46.402,3.325 C2.2@46.475,3.398 ; R3.1@47.625,5.423 R3.1@47.627,5.425 ; CN3.2@54.818,35.738 CN3.2@54.95,35.87 ; v1(69.675,42.125) 69.774,42.125 70.149,41.75 U1.14@71.2,41.75 ; R8.1@78.85,5.375 R8.1@78.875,5.4
  L1 w0.25: U2.10@34.7,36.362 34.7,35.269 34.795,35.174 34.795,34.78 v1(34.825,34.75) ; C22.2@36.8,29.798 v1@36.8,30.8 ; U2.26@43.938,38.1 43.975,38.063 v1(43.975,37.475) ; v1(44.35,63.6) 44.825,63.6 45.4,64.175 ESD2.2@45.4,65.232 ; v1(53.6,64.25) 53.921,64.571 53.921,65.366 ESD3.2@53.924,65.369
  L1 w0.5: C23.1@10.5,53.454 v1(10.5,54.7) ; C24.2@11.15,24.65 v1(12.65,24.65) ; v1(13.425,32.55) 13.425,31.125 C8.2@13.45,31.1 15.404,31.1 C15.2@15.475,31.171 ; v1(14.625,35.15) 14.625,34.348 15.071,33.902 15.146,33.902 15.546,33.502 C16.2@15.546,33.427 ; v1(20.225,34.75) 21.223,34.75 21.423,34.95 C12.2@21.548,34.825 ; v1(20.475,41.1) 20.502,41.1 20.987,40.615 21.357,40.615 21.54,40.798 21.681,40.658 R12.1@21.681,40.615 ; v1(21.6,36.15) C18.2@21.6,37.323 ; C6.2@23.95,53.725 v1(23.95,55.25) ; C1.2@29.9,3.217 v1(29.9,4.525) ; v1(30.3,27.15) C21.2@31.602,27.15 ; v1(30.725,5.325) R4.1@31.898,5.325 ; C20.2@34.152,27.225 v1(35.375,27.225) ; v1(35.5,31.95) 36.702,31.95 C9.2@36.727,31.975 ; R11.1@39.598,81.525 v1(39.598,83.023) ; C7.2@39.8,31.475 v1(41.15,31.475) C13.2@42.475,31.475 42.476,31.476 v1(44.15,31.476) 45.824,31.476 C14.2@45.825,31.477 ; C2.2@46.475,3.398 v1(46.475,4.55) ; R3.1@47.627,5.425 v1(48.8,5.425) ; C17.2@48.934,52.396 49.318,52.781 50.029,52.781 50.298,53.05 v1(50.325,53.05) ; C19.2@48.954,49.975 48.954,49.943 49.354,49.543 49.957,49.543 v1(50.5,49) ; C10.2@49.225,38.25 49.325,38.15 v1(51.023,38.15) ; CN3.2@54.95,35.87 CN3.2@55.1,35.72 ; CN3.2@54.975,35.92 54.985,35.91 56.715,35.91 v1(56.725,35.9) ; C4.2@62.277,2.875 v1(63.45,2.875) ; R7.1@62.425,5.325 v1(63.725,5.325) ; v1(64.425,43.025) C5.2@65.996,43.025 ; v1(78,1.45) 78.013,1.463 78.013,2.636 C3.2@78.027,2.65 ; v1(78.85,4.45) R8.1@78.85,5.375
  L1 w1: C15.2@15.475,31.171 15.475,33.356 C16.2@15.546,33.427
I2C1_SCL: CN2.5 U2.95 | length 24.6
  L1 w0.18: v1(10.414,39.37) v1(19.745,39.37) ; v1(22.682,39.345) 24.892,39.345 26.147,40.6 U2.95@28.462,40.6
  L2 w0.18: CN2.5@7.27,35.65 7.309,35.611 8.839,35.611 10.414,37.186 v1(10.414,39.37) ; v1(19.745,39.37) 22.657,39.37 v1(22.682,39.345)
I2C1_SDA: CN2.4 U2.96 | length 27.3
  L1 w0.18: v1(11.252,38.405) 20.447,38.405 v1(20.828,38.786) ; v1(23.419,38.735) 25.007,38.735 26.372,40.1 U2.96@28.462,40.1
  L2 w0.18: CN2.4@4.73,33.11 5.986,34.366 8.28,34.366 11.252,37.338 v1(11.252,38.405) ; v1(20.828,38.786) 20.879,38.735 v1(23.419,38.735)
JTDI: ESD2.4 R15.2 U2.77 | length 54.8
  L1 w0.2: v1(25.36,50.992) 25.457,50.992 26.85,49.6 U2.77@28.462,49.6 ; v1(28.95,69.475) 33.65,74.175 48.148,74.175 49.075,73.248 R15.2@49.25,73.248 49.225,73.223 49.225,68.705 47.652,67.132 ESD2.4@46.05,67.132
  L2 w0.2: v1(25.36,50.992) 25.36,51.101 25.171,51.289 25.171,65.696 v1(28.95,69.475)
KEY_DOWN: C3.1 ESD1.5 R6.2 U2.38 | length 92.6
  L1 w0.2: ESD1.5@29.975,15.7 29.975,17.016 34.88,21.92 v1(42.824,21.92) 67.78,21.92 74.95,14.75 v1(74.95,11.95) ; U2.38@43.938,44.1 45.675,44.1 46.05,43.725 47.55,43.725 v1(48.075,43.2) ; v1(75,5.4) 76.125,5.4 76.175,5.35 R6.2@76.225,5.4 ; C3.1@76.173,2.65 76.225,2.702 R6.2@76.225,5.35
  L2 w0.2: v1(42.824,21.92) 42.926,22.022 42.926,24.105 48.075,29.254 v1(48.075,43.2) ; v1(74.95,11.95) 74.95,5.45 v1(75,5.4)
KEY_ENTER: C2.1 ESD1.3 R2.2 U2.40 | length 65.2
  L1 w0.2: ESD1.3@31.275,13.8 43.55,13.8 v1(46.125,16.375) ; U2.40@43.938,45.1 48.078,45.1 49.375,43.803 v1(49.375,43.725) ; C2.1@44.548,3.325 44.548,5.423 R2.2@44.575,5.45 44.625,5.5 v1(46.075,5.5)
  L2 w0.2: v1(46.075,5.5) 46.125,5.55 v1(46.125,16.375) 48,18.25 48,24.48 49.375,25.855 v1(49.375,43.725)
KEY_ESC: C1.1 ESD1.1 R1.2 U2.41 | length 69.8
  L1 w0.2: C1.1@28.048,3.215 28.048,5.398 R1.2@28.097,5.447 28.497,5.847 28.847,5.847 v1(29.625,6.625) ; ESD1.1@29.975,13.8 29.975,11.308 29.675,11.008 v1(29.675,10.9) 29.75,10.825 31.025,10.825 31.325,11.125 43.75,11.125 v1(50.4,17.775) ; U2.41@43.938,45.6 50.4,45.6 v1(50.425,45.575)
  L2 w0.2: v1(29.625,6.625) 29.625,10.85 v1(29.675,10.9) ; v1(50.4,17.775) 50.4,17.817 50.675,18.092 50.675,23.75 50.343,24.082 50.343,38.49 50.425,38.572 v1(50.425,45.575)
KEY_UP: C4.1 ESD1.4 R5.2 U2.39 | length 80
  L1 w0.2: ESD1.4@31.275,15.7 31.28,15.705 40.655,15.705 v1(45.475,20.525) 58.35,20.525 v1(58.413,20.463) ; U2.39@43.938,44.6 45.8,44.6 46,44.4 v1(47.625,44.4) ; v1(58.85,4) 58.85,3.017 58.967,2.9 60.225,2.9 60.25,2.875 C4.1@60.423,2.875
  L1 w0.5: C4.1@60.225,3.148 R5.2@60.225,5.3
  L2 w0.2: v1(45.475,20.525) 45.475,24.799 48.675,27.999 48.675,43.449 47.724,44.4 v1(47.625,44.4) ; v1(58.413,20.463) 58.85,20.025 v1(58.85,4)
LCD_BACKLIGTH: Q1.G R9.1 U2.97 | length 74.4
  L1 w0.18: U2.97@28.462,39.6 32.275,39.6 32.775,40.1
  L1 w0.2: 32.775,40.1 33.1,40.425 33.1,44.425 33.8,45.125 v1(40.725,45.125) ; v1(49.8,44.875) 64.325,44.875 67.275,47.825 v1(67.275,50.875) ; Q1.G@89.15,52.2 Q1.G@89.225,52.275 ; v1(89.4,53.35) 89.4,52.325 Q1.G@89.45,52.275
  L1 w0.5: R9.1@87.275,52.304 87.304,52.275 89.225,52.275 Q1.G@89.45,52.275
  L2 w0.2: v1(40.725,45.125) 48.575,45.125 48.825,44.875 v1(49.8,44.875) ; v1(67.275,50.875) 69.675,53.275 89.325,53.275 v1(89.4,53.35)
LED_3: R24.1 U2.93 | length 35.8
  L1 w0.2: R24.1@23.973,71.478 R24.1@23.973,71.653 ; v1(25.121,41.072) 25.649,41.6 U2.93@28.462,41.6
  L1 w0.5: v1(22.525,69.125) 22.525,70.03 R24.1@23.973,71.478
  L2 w0.2: v1@22.53,69.125 22.53,43.84 25.121,41.25 v1(25.121,41.072)
LED_ERROR_HANDLER: R22.1 U2.91 | length 44.5
  L1 w0.2: v1(21.412,43.434) 22.246,42.6 U2.91@28.462,42.6
  L1 w0.5: v1(21.275,76.075) 22.825,77.625 R22.1@23.973,77.625
  L2 w0.2: v1(21.275,76.075) 21.275,64.956 20.015,63.696 20.015,59.284 21.412,57.887 v1(21.412,43.434)
LED_MCU_RUN: R23.1 U2.92 | length 44
  L1 w0.2: v1(20.4,42.7) 21.003,42.7 21.603,42.1 U2.92@28.462,42.1
  L1 w0.5: v1(20.375,73.35) 21.549,74.524 23.948,74.524 R23.1@23.973,74.549
  L2 w0.2: v1(20.375,73.35) 20.375,64.662 19.2,63.487 19.2,58.6 19.9,57.9 19.9,43.2 v1(20.4,42.7)
NetC20_1: C20.1 LSE1.1 U2.9 | length 7.3
  L1 w0.2: C20.1@34.15,29.077 C20.1@34.175,29.102 ; LSE1.1@34.175,31.35 34.2,31.375 U2.9@34.2,36.362
  L1 w0.25: C20.1@34.175,29.102 LSE1.1@34.175,31.35
NetC21_1: C21.1 LSE1.2 U2.8 | length 8.1
  L1 w0.2: LSE1.2@31.675,31.35 31.675,32.65 33.7,34.675 U2.8@33.7,36.362
  L1 w0.25: C21.1@31.675,29.077 LSE1.2@31.675,31.35
NetCN4_11: CN4.11 R11.2 | length 7.7
  L1 w0.2: R11.2@41.652,81.525 43.275,81.525 44.5,82.75 47.558,82.75 47.873,82.435 47.873,81.712 CN4.11@47.95,81.635
NetD1_1: D1.1 R10.1 | length 9.8
  L1 w0.5: R10.1@89.323,48.3 89.323,44.352 91.475,42.2 v1(91.475,41.625)
  L2 w0.2: D1.1@91.402,39.46 D1.1@91.475,39.533
  L2 w0.5: D1.1@91.475,39.533 v1(91.475,41.625)
NetL1_2: L1.2 U2.46 | length 10
  L1 w0.2: U2.46@43.938,48.1 51.419,48.1 51.537,48.217 51.537,50.568 L1.2@51.562,50.593
NetLD1_A: LD1.A R22.2 | length 3.1
  L1 w0.5: R22.2@26.027,77.625 27.475,77.625 v1(27.5,77.65)
  L2 w0.5: v1(27.5,77.65) 27.519,77.631 29.069,77.631 LD1.A@29.1,77.6
NetLD2_A: LD2.A R23.2 | length 3.1
  L1 w0.5: R23.2@26.027,74.549 v1(27.575,74.55) v1(27.575,74.55)
  L2 w0.5: v1(27.575,74.55) 27.602,74.55 27.652,74.5 LD2.A@29.1,74.5
NetLD3_A: LD3.A R24.2 | length 3.1
  L1 w0.5: R24.2@26.097,71.567 26.097,71.613 26.208,71.725 v1(27.375,71.725)
  L2 w0.5: v1(27.375,71.725) 27.394,71.706 29.069,71.706 LD3.A@29.1,71.675
NetQ1_D: Q1.D R10.2 | length 3.3
  L1 w0.5: R10.2@91.377,48.3 91.377,49.65 91.975,50.248 Q1.D@91.975,51.332
NetR1_1: R1.1 R3.2 SW1.2 | length 32.4
  L1 w0.2: SW1.2@18.75,7.25 20.325,5.675 26.096,5.675 27.922,7.501 R1.1@28.097,7.501 29.824,7.501 30.95,6.375 32.925,6.375 33.8,5.5 43.208,5.5 43.325,5.617 43.325,6.408 43.442,6.525 46.498,6.525 47.45,7.477 R3.2@47.625,7.477
NetR2_1: R2.1 R4.2 SW2.2 | length 14.1
  L1 w0.2: R4.2@31.9,7.377 31.923,7.4 SW2.2@34.6,7.4 ; SW2.2@34.75,7.25 37.35,7.25 38.65,5.95 42.608,5.95 42.725,6.067 42.725,7.384 42.842,7.501 R2.1@44.17,7.501
NetR5_1: R5.1 R7.2 SW3.2 | length 13
  L1 w0.2: R5.1@60.225,7.354 62.4,7.354 R7.2@62.425,7.379
  L1 w0.3: SW3.2@50.75,7.25 52.3,5.7 58.396,5.7 60.05,7.354 R5.1@60.225,7.354
NetR6_1: R6.1 R8.2 SW4.2 | length 13.7
  L1 w0.2: SW4.2@66.75,7.25 68.553,5.447 74.043,5.447 76.05,7.454 R6.1@76.225,7.454 R8.2@78.875,7.454
NetR12_2: R12.2 U2.94 | length 5
  L1 w0.2: R12.2@23.785,40.615 23.908,40.492 25.43,40.492 26.038,41.1 U2.94@28.462,41.1
NRST: C22.1 ESD3.1 R18.2 U2.14 | length 76.9
  L1 w0.2: U2.14@36.7,36.362 36.7,35.105 36.817,34.988 37.733,34.988 37.85,34.871 37.85,34.576 38.225,34.201 38.225,29.82 ; C22.1@36.805,27.889 38.108,27.889 38.225,28.007 38.225,29.82 ; R18.2@45.925,73.198 46.1,73.198 47.6,71.698 v1(47.6,67.9) ; v1(51.975,67.925) 51.975,65.754 52.36,65.369 ESD3.1@53.274,65.369 ; v1(51.994,31.521) 51.352,30.88 47.196,30.88 46.567,30.251 41.09,30.251 40.658,29.82 38.225,29.82
  L2 w0.2: v1(47.6,67.9) 47.625,67.925 v1(51.975,67.925) 51.975,63.725 53.086,62.614 53.086,47.349 51.994,46.257 v1(51.994,31.521)
PA0: CN2.10 U2.22 | length 39.4
  L1 w0.2: CN2.10@4.73,40.855 6.063,39.522 8.814,39.522 9.271,39.98 v1(20.396,39.98) ; v1(38.925,40.025) 40.7,38.25 U2.22@40.7,36.362
  L2 w0.2: v1(20.396,39.98) 38.88,39.98 v1(38.925,40.025)